# Altium PCB Z1Shield.PcbDoc
Units mil, origin at the board's own origin, x right, y up, seen from the top; angles counter-clockwise.
Board outline 1357.48 x 2289.02 mil, 2 copper layers (Top Layer, Bottom Layer), stack 12.8 mil thick; 7 components, 12 nets, 83 pads, 0 vias.
Unrouted connection lines stored in the file: 2.
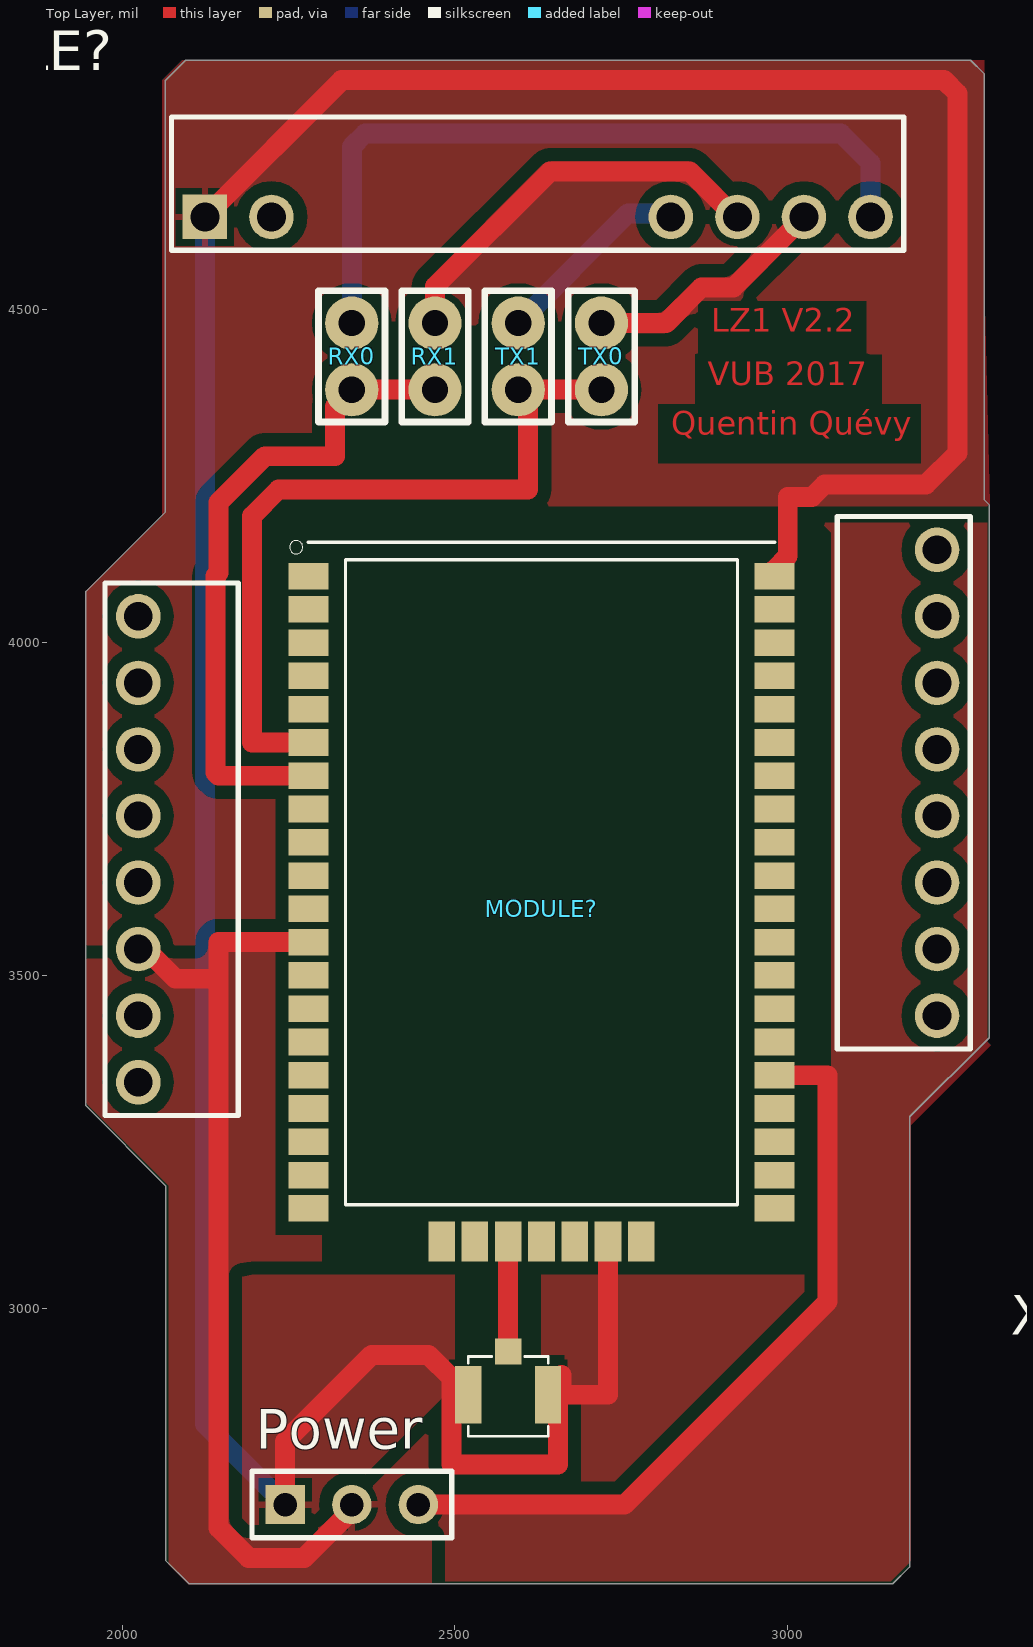
[diagram p0: Top Layer view]
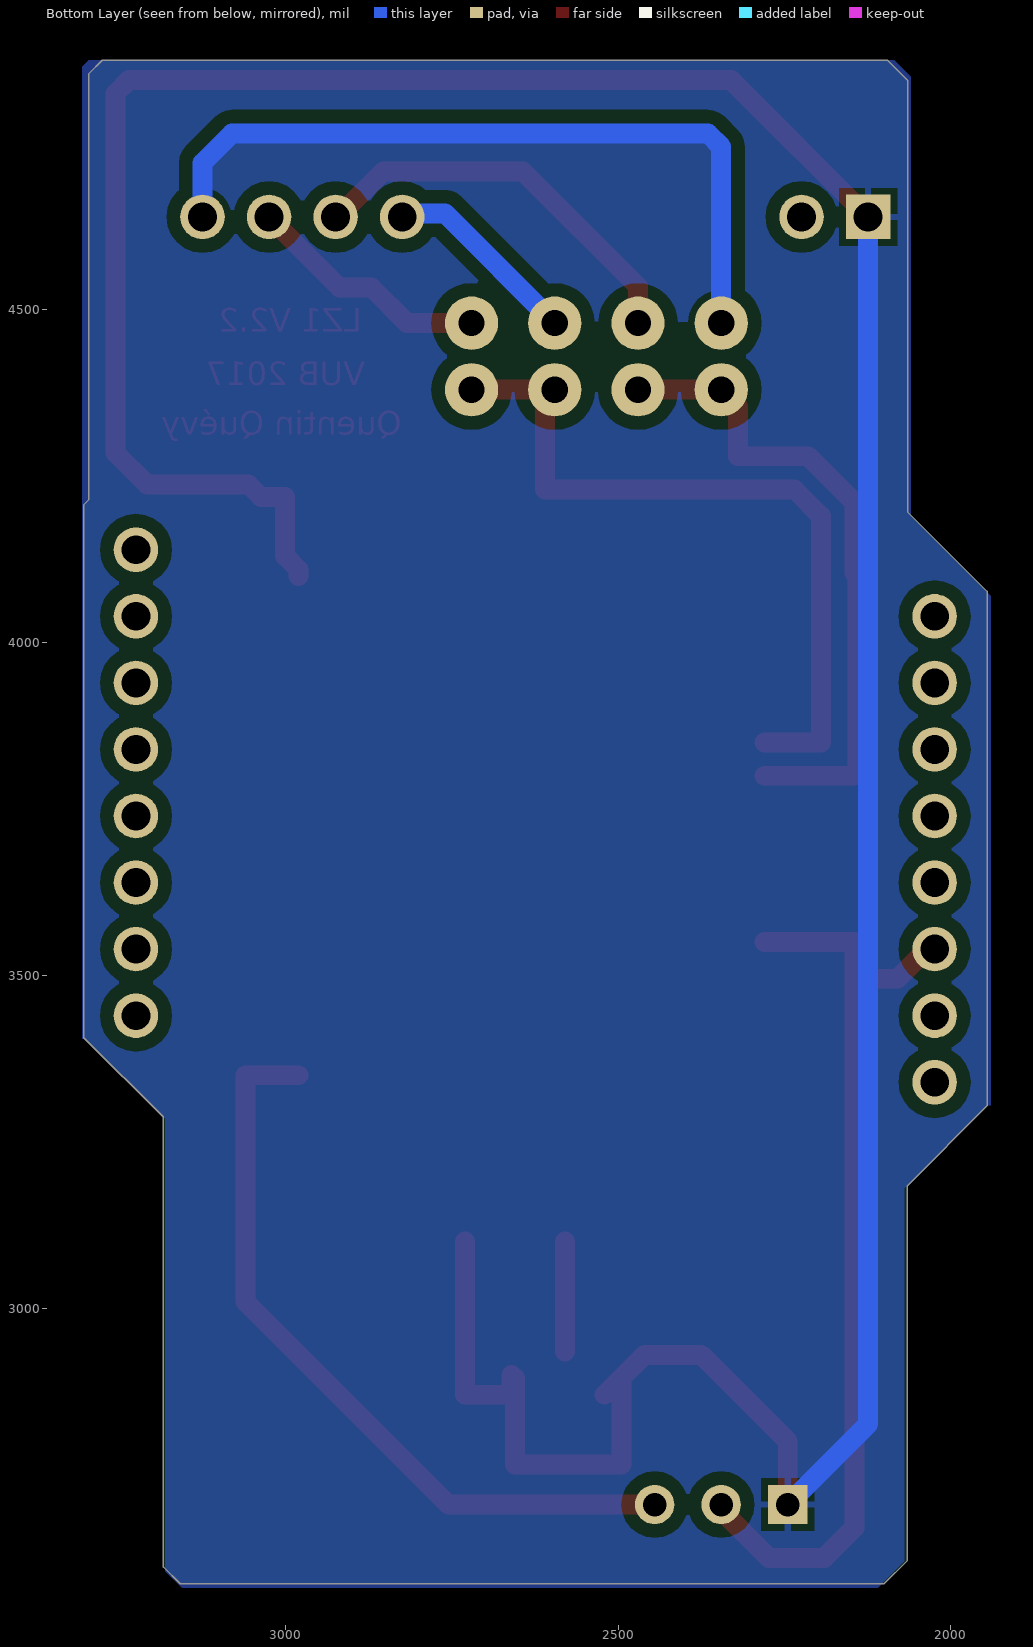
[diagram p1: Bottom Layer view, seen from below]
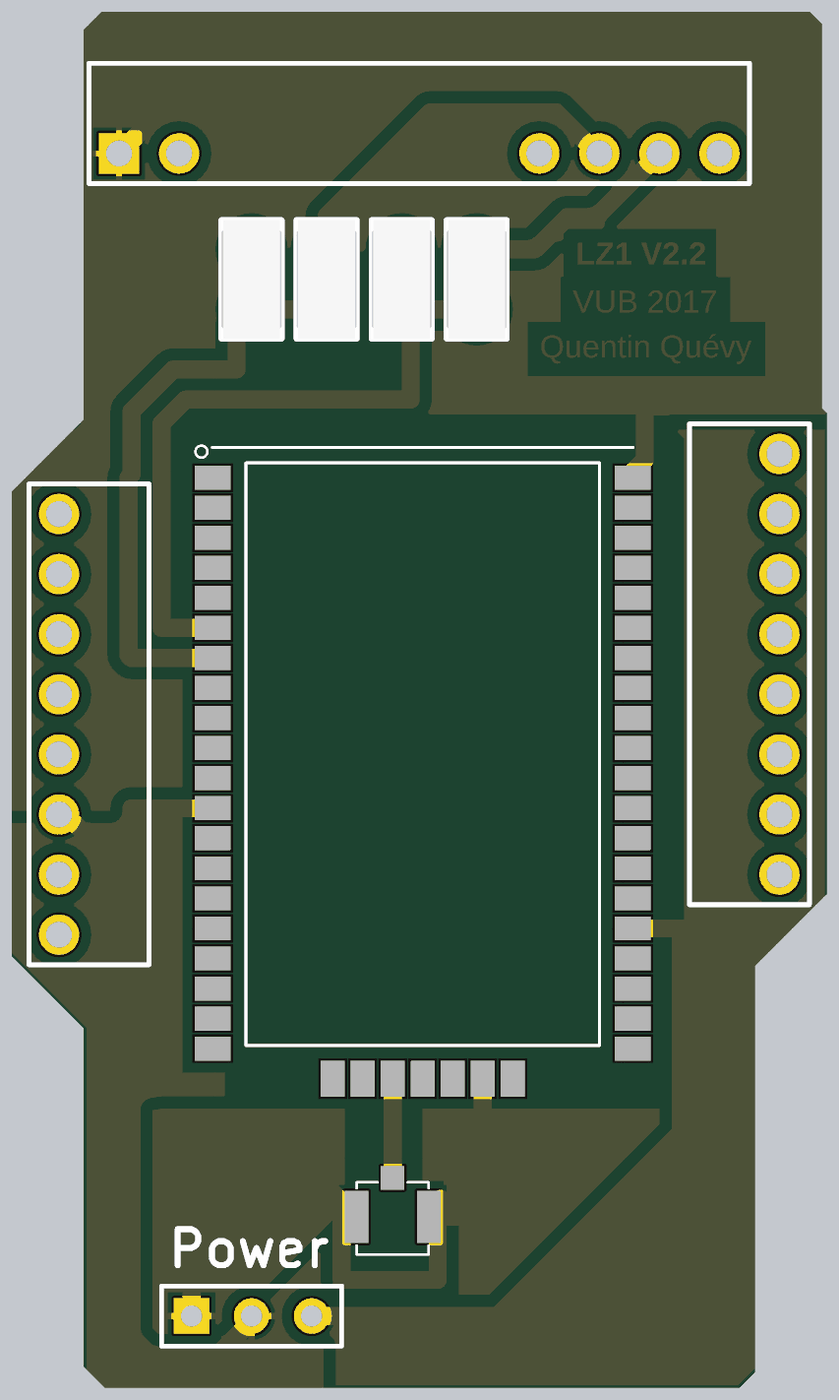
[diagram p2: 3D render of the assembled board from above, using the file's embedded part models]

## Layer stack, top to bottom
Top Solder 1: solder mask 0.4, Solder Resist, Dk 3.5
Top Layer: signal copper 1.4
Dielectric 1: core 10, FR-4, Dk 4.2
Bottom Layer: signal copper 1.4
Bottom Solder 1: solder mask 0.4, Solder Resist, Dk 3.5

## Board outline
2065.24,2621.03 2065.24,3184 1945.55,3304.04 1945.55,4076.93 2064.9,4196.27 2064.9,4844.9 2095,4875 3275,4875 3295,4855 3295,4215 3303.03,4206.97 3303.03,3406.46 3302.64,3406.46 3183.36,3287.63 3183.35,3287.64 3183.35,2610.78 3182.95,2611.18 3157.75,2585.98 2100.27,2585.98

## Design rules (kind name [scope] priority, off if disabled: settings)
Clearance [All] p1: gap=20
PolygonConnect [All] p1: connectstyle=Relief reliefconductorwidth=10 reliefentries=4 polygonreliefangle="90 Angle" airgapwidth=10
RoutingVias [All] p1: holewidth=28 width=50 viastyle="Through Hole" minholewidth=28 minwidth=50 maxholewidth=28 maxwidth=50
SolderMaskExpansion [All] p1: expansion=4
Width [All] p1: maxlimit=40 minlimit=20 preferedwidth=30
30 further rules are at their usual default settings.

## Components (designator, comment, footprint, x,y, rotation, side; value= is the part's Value field where it differs from the comment)
MODULE? "RN2483-I/RM095" MICROCHIP_RN2483-I/RM095 2630,3625 r0 top
Power "Header 3" HDR1X3 2245,2705 r0 top
RX0 "Header 2" JUMPER 2345,4430 r90 top
RX1 "Header 2" JUMPER 2470,4430 r90 top
TX0 "Header 2" JUMPER 2720,4430 r90 top
TX1 "Header 2" JUMPER 2595,4430 r90 top
X? "U.FL RF Connector" U.FL 2580,2902.48 r180 top

## Footprints (in the part's own frame and the unit in brackets; to place one, negate y for a bottom-side part, rotate by r counter-clockwise, add the part's x,y. Pads: shape width x height; smd on the part's side, far side on the other; paste and mask are expansions set on the pad)
HDR1X3 [mm] "Connector; Header; 3 Position"
  rect 1.5x1.5 hole 0.9: 1(0,0)
  round 1.5 hole 0.9: 2(2.54,0) 3(5.08,0)
  silkscreen extent -1.27,-1.27 6.35,1.27
JUMPER [mil] "Jumper, 100 mil pitch"
  round 80 hole 39.37: 1(-50,0) 2(50,0)
  silkscreen extent -98,-50 98,50, body extent -98,-50 98,50, height 374
MICROCHIP_RN2483-I/RM095 [mil]
  rect 60x40 smd paste-1000 mask-1000: 1(-350,475) 2(-350,425) 3(-350,375) 4(-350,325) 5(-350,275) 6(-350,225) 7(-350,175) 8(-350,125) 9(-350,75) 10(-350,25) 11(-350,-25) 12(-350,-75) 13(-350,-125) 14(-350,-175) 15(-350,-225) 16(-350,-275) 17(-350,-325) 18(-350,-375) 19(-350,-425) 20(-350,-475) 28(350,-475) 29(350,-425) 30(350,-375) 31(350,-325) 32(350,-275) 33(350,-225) 34(350,-175) 35(350,-125) 36(350,-75) 37(350,-25) 38(350,25) 39(350,75) 40(350,125) 41(350,175) 42(350,225) 43(350,275) 44(350,325) 45(350,375) 46(350,425) 47(350,475)
  rect 40x60 smd paste-1000 mask-1000: 21(-150,-525) 22(-100,-525) 23(-50,-525) 24(0,-525) 25(50,-525) 26(100,-525) 27(150,-525)
  silkscreen extent -378,-470 350,528
U.FL [mm]
  rect 1x1 smd: 1(0,-0.825)
  rect 1x2.2 smd: 2(-1.524,0.825) 2(1.524,0.825)
  silkscreen extent -1.52,-0.63 1.52,2.41

## Part data
MODULE?: "Sub-GHz Dual Band Long Range Transceiver LoRa Module"
Power: "Header, 3-Pin"
RX0 RX1 TX0 TX1: "Header, 2-Pin"
X?: library part AntennaOmnidirectional, "CONN RF MICROCOAXIAL SMD GOLD"

## Free pads (board coordinates)
  rect 66.93x66.93 hole 43.31 mask+4.72: 17(2124.29,4639.53)
  round 66.93 hole 43.31: 19(2224.29,4639.53) 31(2824.29,4639.53) 33(2924.29,4639.53) 35(3024.29,4639.53) 37(3124.29,4639.53) 40(2024.29,4039.53) 40(3224.29,4139.53) 42(2024.29,3939.53) 42(3224.29,4039.53) 44(2024.29,3839.53) 44(3224.29,3939.53) 46(2024.29,3739.53) 46(3224.29,3839.53) 48(2024.29,3639.53) 48(3224.29,3739.53) 50(2024.29,3539.53) 50(3224.29,3639.53) 52(2024.29,3439.53) 52(3224.29,3539.53) 54(2024.29,3339.53) 54(3224.29,3439.53)

## Nets (pads, with @x,y where several pads share a name; then routed paths per layer and width w, separated by ;. In a path a pad name is that pad's centre, name@x,y a point inside that pad or via, vN(x,y) a via of type N, cw(c..) or ccw(c..) an arc to the next point about the centre after c; other vN are vias at no path point)
NetMODULE?_4: MODULE?.4 MODULE?.8
NetMODULE?_5: MODULE?.5 MODULE?.11
NetMODULE?_6: MODULE?.6 TX0.1 TX1.1 | length 1137.8
  Top Layer w30: MODULE?.6 2195,3850 2195,4190 2235,4230 2610,4230 2610,4365 TX1.1 TX0.1
NetMODULE?_7: MODULE?.7 RX0.1 RX1.1 | length 988.9
  Top Layer w30: MODULE?.7 2145,3800 2140,3805 2140,4100 2145,4105 2145,4210.71 2214.29,4280 2320,4280 2320,4355 RX0.1 RX1.1
NetMODULE?_12: MODULE?.12 pad.50@2024.29,3539.53 Power.2 | length 1410.9
  Top Layer w30: pad.50@2024.29,3539.53 2035.47,3539.53 2080,3495 2145,3495 ; MODULE?.12 2145,3550 2145,3495 ; Power.2 2345,2696.45 2273.55,2625 2190,2625 2145,2670 2145,3495
NetMODULE?_23: MODULE?.23 X?.1 | length 165
  Top Layer w30: X?.1 MODULE?.23
NetMODULE?_26: MODULE?.26 MODULE?.47 pad.17 Power.1 X?.2 | length 5370.9
  Top Layer w30: pad.17 2329.76,4845 3235,4845 3255,4825 3255,4285 3207.5,4237.5 3055.24,4237.5 3036.48,4218.73 3000,4218.73 3000,4130 2980,4110 MODULE?.47 ; Power.1 2245,2800 2375,2930 2460,2930 2495,2895 ; X?.2@2520,2870 2495,2895 ; MODULE?.26 2730,2870 X?.2@2655,2870 ; 2495,2895 2495,2765 2655,2765 X?.2@2655,2870 ; X?.2@2655,2870 2655,2895 2660,2900 2660,2875 X?.2@2655,2870
  Bottom Layer w30: pad.17 2124.29,2825.71 Power.1
RESET: MODULE?.32 Power.3 | length 1161.3
  Top Layer w30: Power.3 2755,2705 3060,3010 3060,3350 MODULE?.32
RX0: pad.37 RX0.2 | length 1152.1
  Bottom Layer w30: RX0.2 2345,4745 2365,4765 3080,4765 3124.29,4720.71 pad.37
RX1: pad.33 RX1.2 | length 609.3
  Top Layer w30: RX1.2 2470,4535 2642.99,4707.99 2852.65,4707.99 2921.11,4639.53 pad.33
TX0: pad.35 TX0.2 | length 373.5
  Top Layer w30: TX0.2 2816.87,4480 2870.5,4533.63 2918.39,4533.63 pad.35 pad.35@3021.11,4639.53
TX1: pad.31 TX1.2 | length 306.3
  Top Layer w30: pad.31@2819.76,4635 pad.31
  Bottom Layer w30: TX1.2 2760,4645 2818.82,4645 pad.31
pads on no net: MODULE?.1 MODULE?.2 MODULE?.3 MODULE?.9 MODULE?.10 MODULE?.13 MODULE?.14 MODULE?.15 MODULE?.16 MODULE?.17 MODULE?.18 MODULE?.19 MODULE?.20 MODULE?.21 MODULE?.22 MODULE?.24 MODULE?.25 MODULE?.27 MODULE?.28 MODULE?.29 MODULE?.30 MODULE?.31 MODULE?.33 MODULE?.34 MODULE?.35 MODULE?.36 MODULE?.37 MODULE?.38 MODULE?.39 MODULE?.40 MODULE?.41 MODULE?.42 MODULE?.43 MODULE?.44 MODULE?.45 MODULE?.46

## Polygon pours and split planes (outlines as drawn)
NetMODULE?_26 on Top Layer "GND" (solid, remove dead copper, pour order 0): 2315,4205 2290,3530 2115,3545.55 1945.55,3545.55 1945.55,4076.93 2060,4190 2060,4845 2090,4875 3295,4875 3295,4535 3303.5,4205
NetMODULE?_26 on Top Layer "GND" (solid, remove dead copper, pour order 2): 2195,3050 2500,3050 2500,2885 2280,2665 2270,2675 2155,2675 2155,3020 2135,3040
NetMODULE?_26 on Top Layer "GND" (solid, remove dead copper, pour order 12): 2690,2880 2690,2715 2855,2715 3125,2985 3055,3055 3050,3050 2890,3050 2810,3050 2735,3055 2725,3045 2720,3050 2630,3050 2630,2930 2665,2930 2665,2880 2695,2880
RX1 on Top Layer "GND" (solid, remove dead copper, pour order 14): 2345,4480 2345,4810 2335,4820 2350,4805 3155,4805 3155,4545 3190,4510 3155,4475 2615,4475
TX0 on Top Layer "GND" (solid, remove dead copper, pour order 16): 2625,4705 2970,4705 3050,4625 2840,4415 2840,4400 2590,4400 2545,4445
NetMODULE?_12 on Top Layer "VCC" (solid, remove dead copper, pour order 22): 1850,3635 1900,3585 2300,3585 2300,2980 2320,2960 2465,2815 2465,2585.98 2285,2585.98 2100.27,2584.73 2090,2595 2070,2615 2070,2620 2070,3155 2070,3184 1945.55,3308.44 1945.55,3545.55
RESET on Top Layer "REESET" (solid, remove dead copper, pour order 24): 3025,4175 3030,4180 3300,4180 3300,3400 3305,3395 3185,3275 3185,2620 3180,2615 3155,2590 2480,2590 2475,2585 2445,2615 2445,2705 2755,2705 3060,3010 3065,3015 3065,3355 3065,4165 3050,4180
RX0 on Bottom Layer "RX" (solid, remove dead copper, pour order 28): 2350,4485 2355,4490 2355,4755 3070,4755 3080,4765 3124.29,4720.71 3124.29,4639.53 2824.29,4639.53 2800,4615.24 2800,4455
NetMODULE?_26 on Bottom Layer "GND" (solid, remove dead copper, pour order 26): 3155,2580 3180,2605 3180,2615 3180,3285 3300,3405 3305,3405 3305,4865 3295,4875 2095,4875 2085,4875 2060,4850 2060,4190 1940,4070 1940,3305 1945,3305 2070,3180 2070,2620 2110,2580

## Other copper
Top Layer:
  text "LZ1 V2.2" at 2885,4455 h60
  text "VUB 2017" at 2880,4375 h60
  text "Quentin Quévy" at 2825,4300 h60

## Silkscreen, mask and mechanical layers (free items; w line width, h text height)
Top Overlay:
  lines w7.87: 1974.29,3289.53 2174.29,3289.53 2174.29,4089.53 1974.29,4089.53 1974.29,3289.53 ; 2074.29,4589.53 3174.29,4589.53 3174.29,4789.53 2074.29,4789.53 2074.29,4589.53 ; 3074.29,3389.53 3074.29,4189.53 3274.29,4189.53 3274.29,3389.53 3074.29,3389.53
Mechanical 3:
  lines w7.87: 1945.55,3304.04 2065.24,3184 2065.24,2621.03 2100.27,2585.98 2598.03,2585.98 3157.75,2585.98 3182.95,2611.18 ; 1945.55,4076.93 2064.9,4196.27 2064.9,4788.01 ; 3183.35,2610.78 3183.35,3287.64
  lines w10: 2064.9,4788.01 2064.9,4844.9 2095,4875 3275,4875 3295,4855 3295,4795 3295,4215 3310,4200 3310,3400 3197.64,3287.64 3185,3275 3183.35,3275